# Altium PCB Circuit.PcbDoc
Units mil, origin at the board's own origin, x right, y up, seen from the top; angles counter-clockwise.
Board outline 1600 x 1600 mil, 2 copper layers (Top Layer, Bottom Layer); 11 components, 8 nets, 26 pads, 2 vias.
Unrouted connection lines stored in the file: 1.
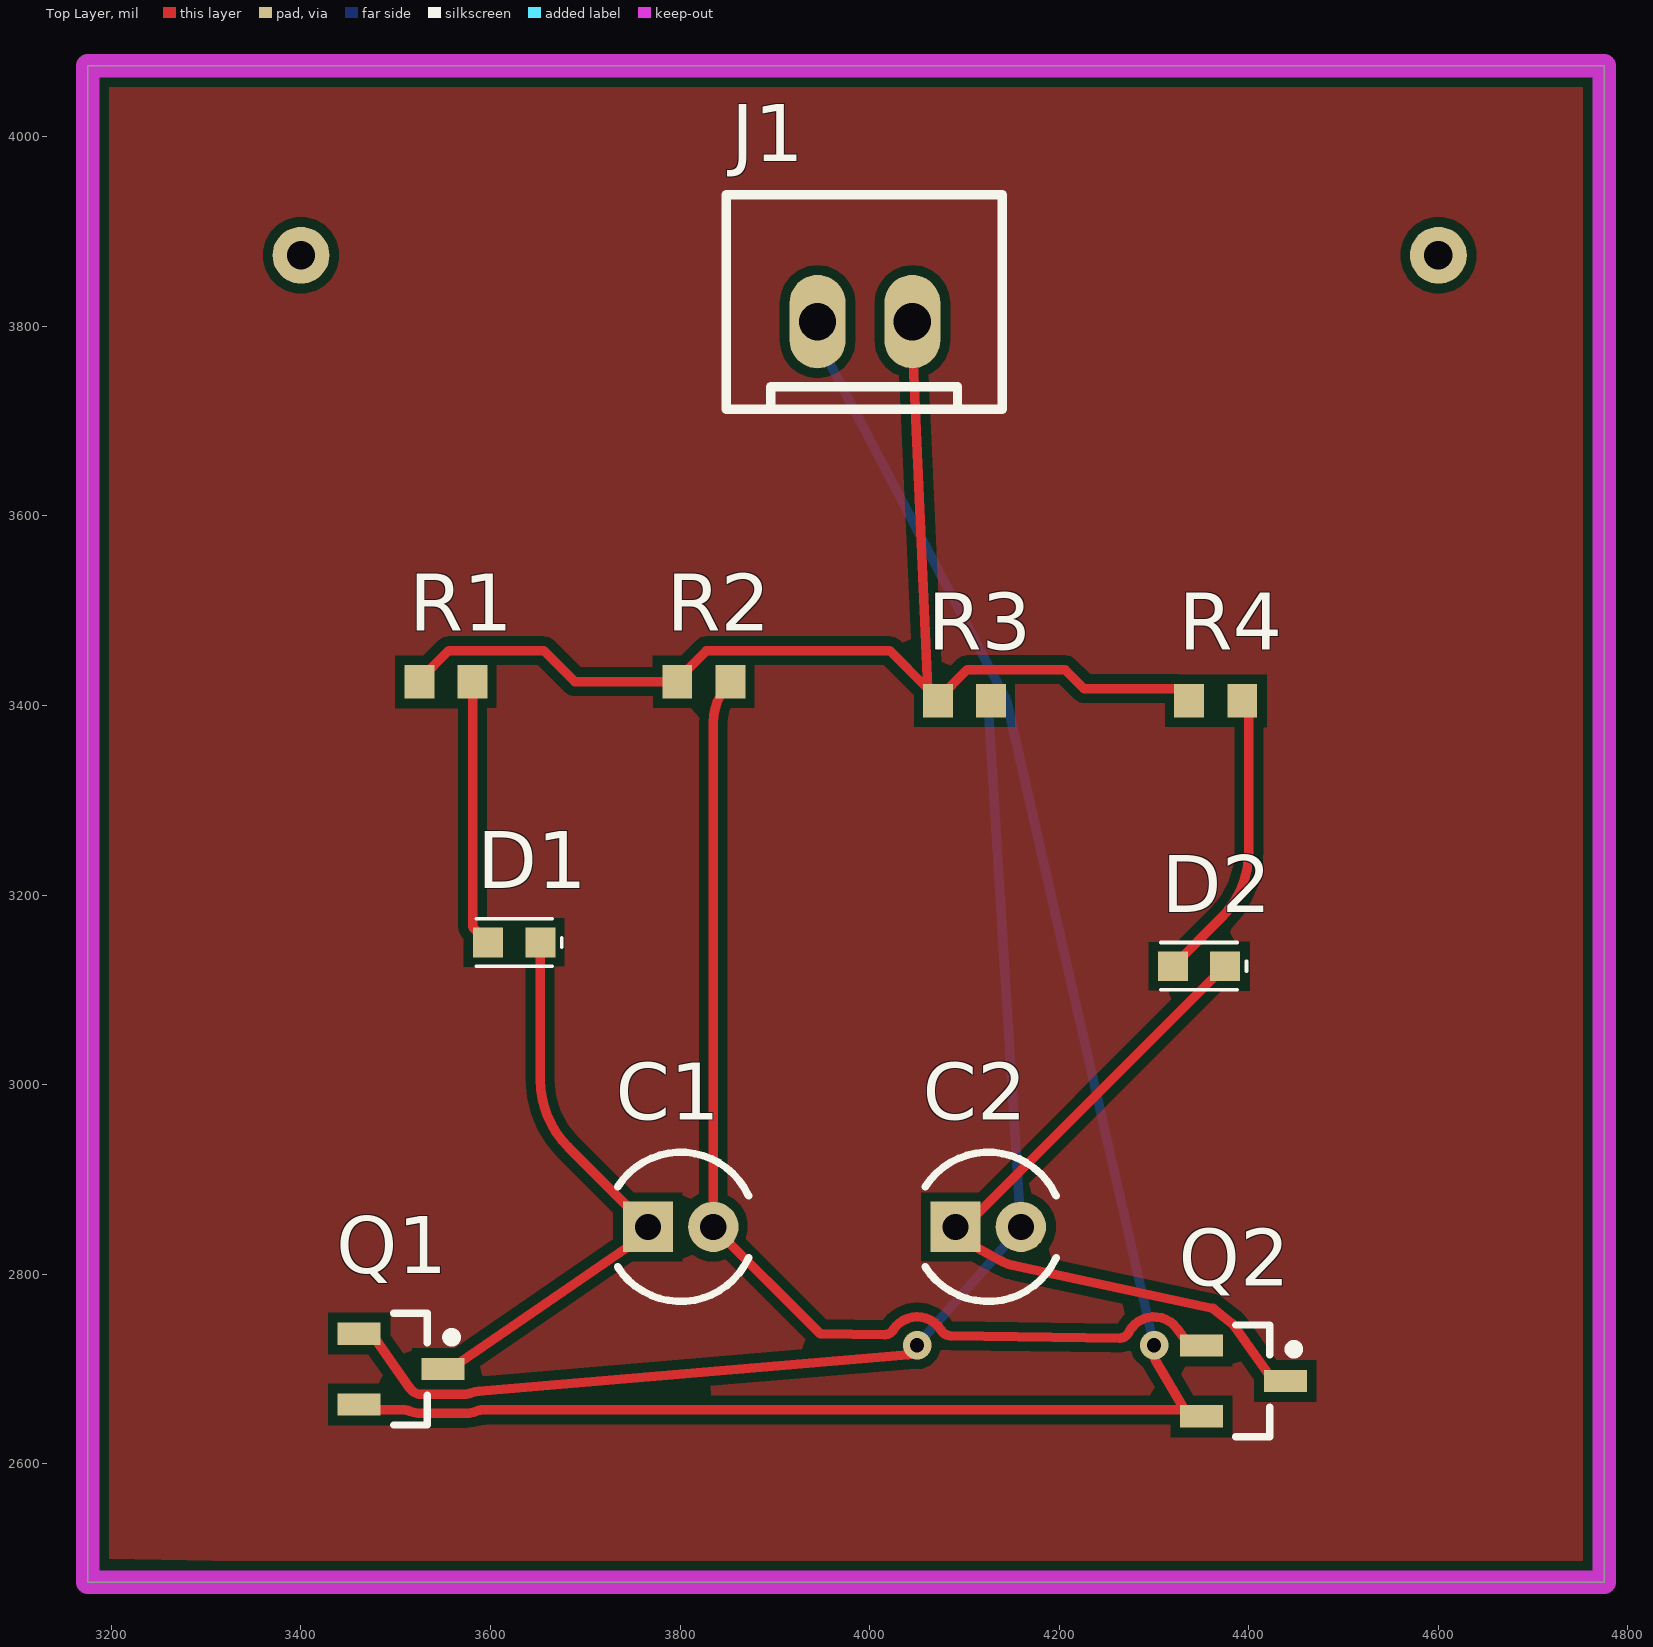
[diagram p0: Top Layer view]
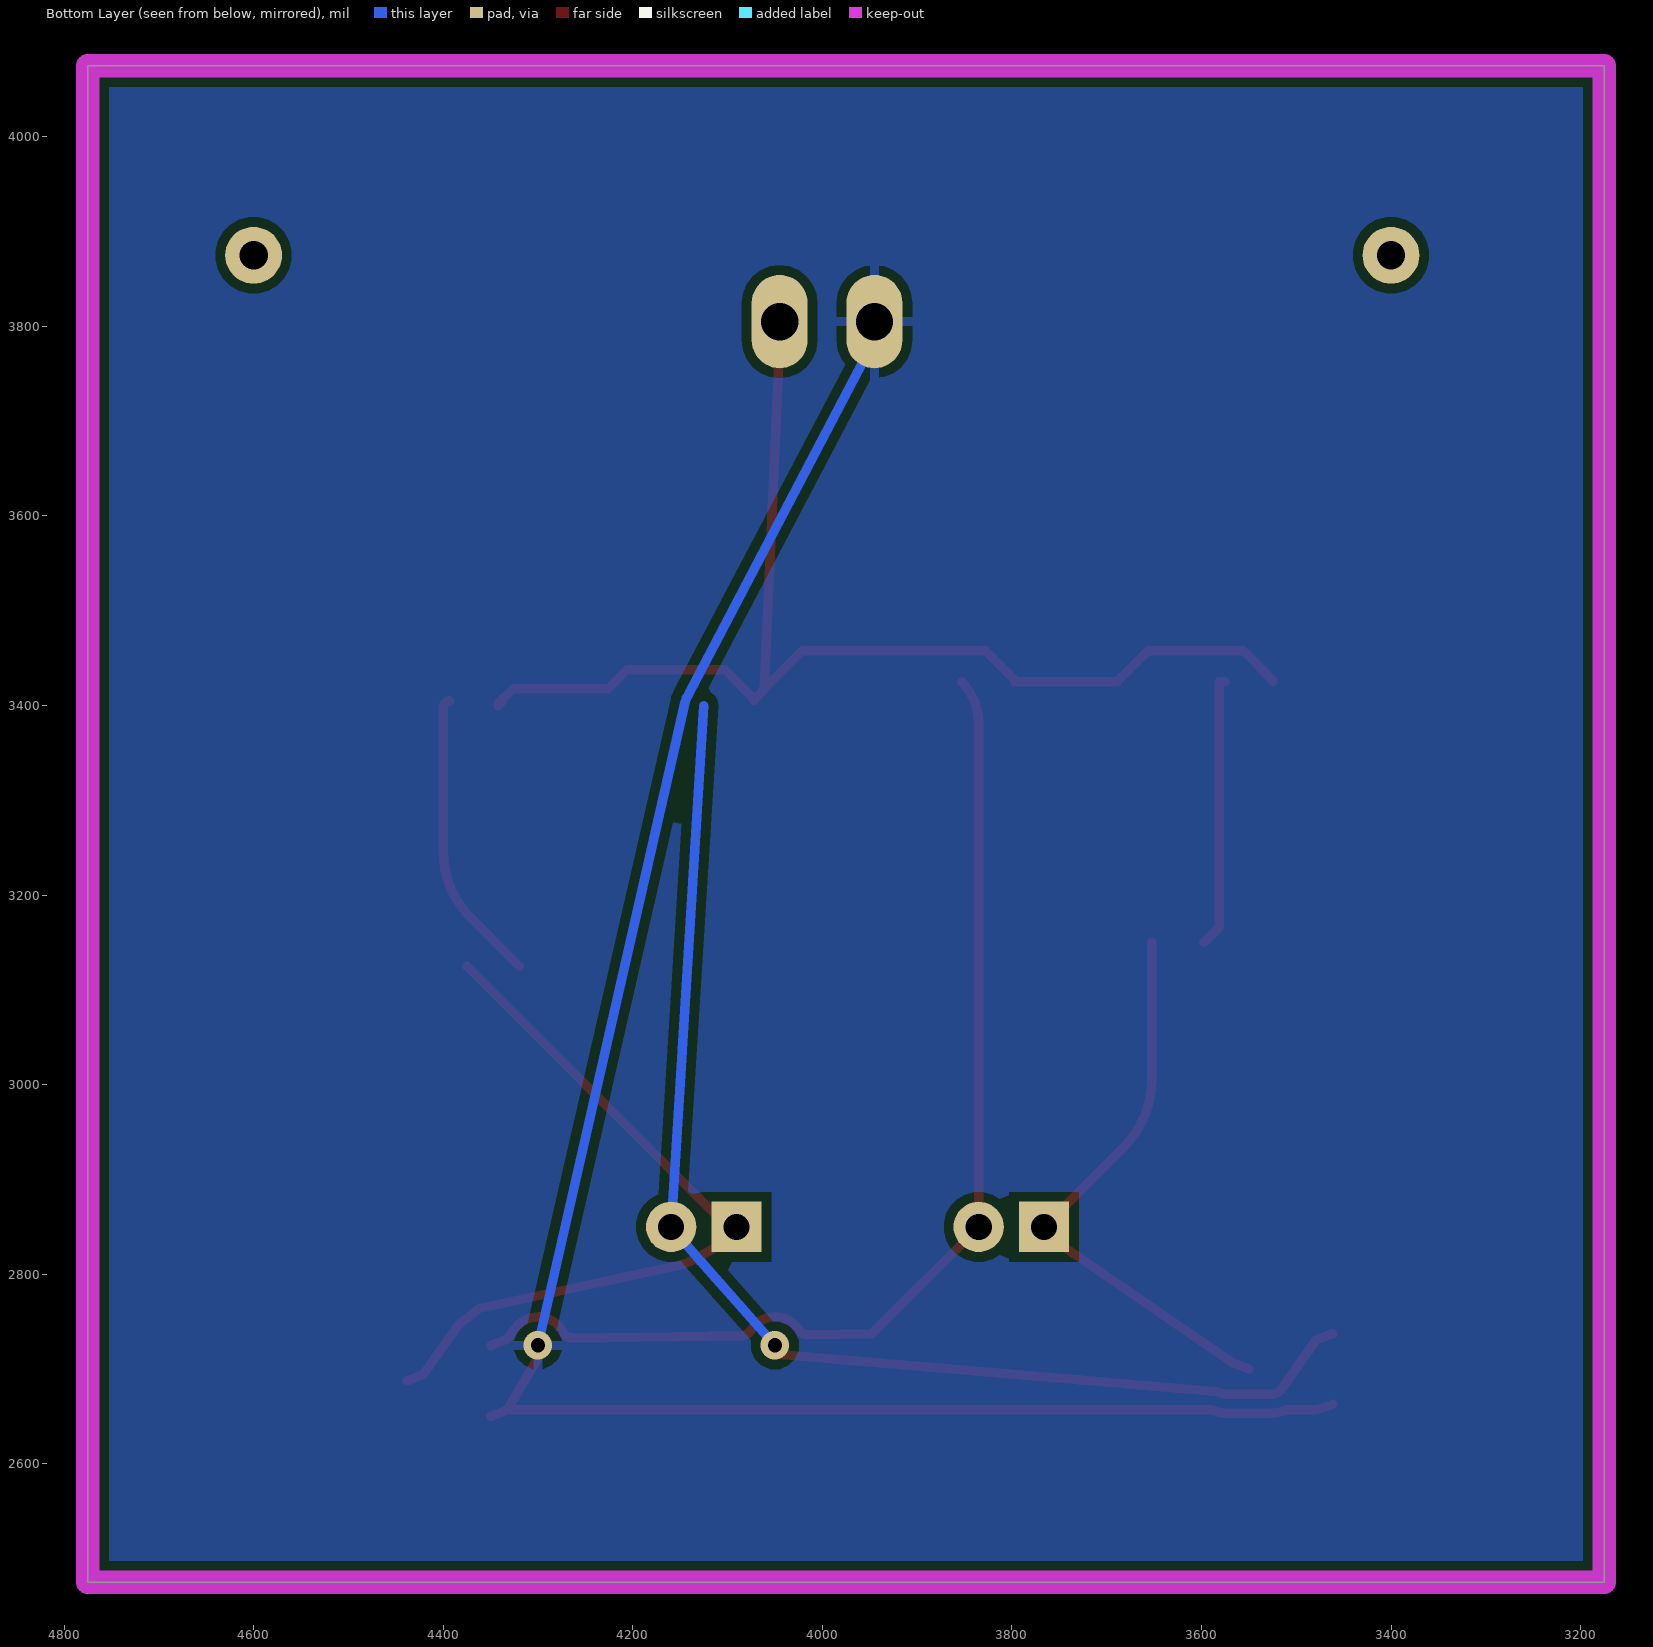
[diagram p1: Bottom Layer view, seen from below]
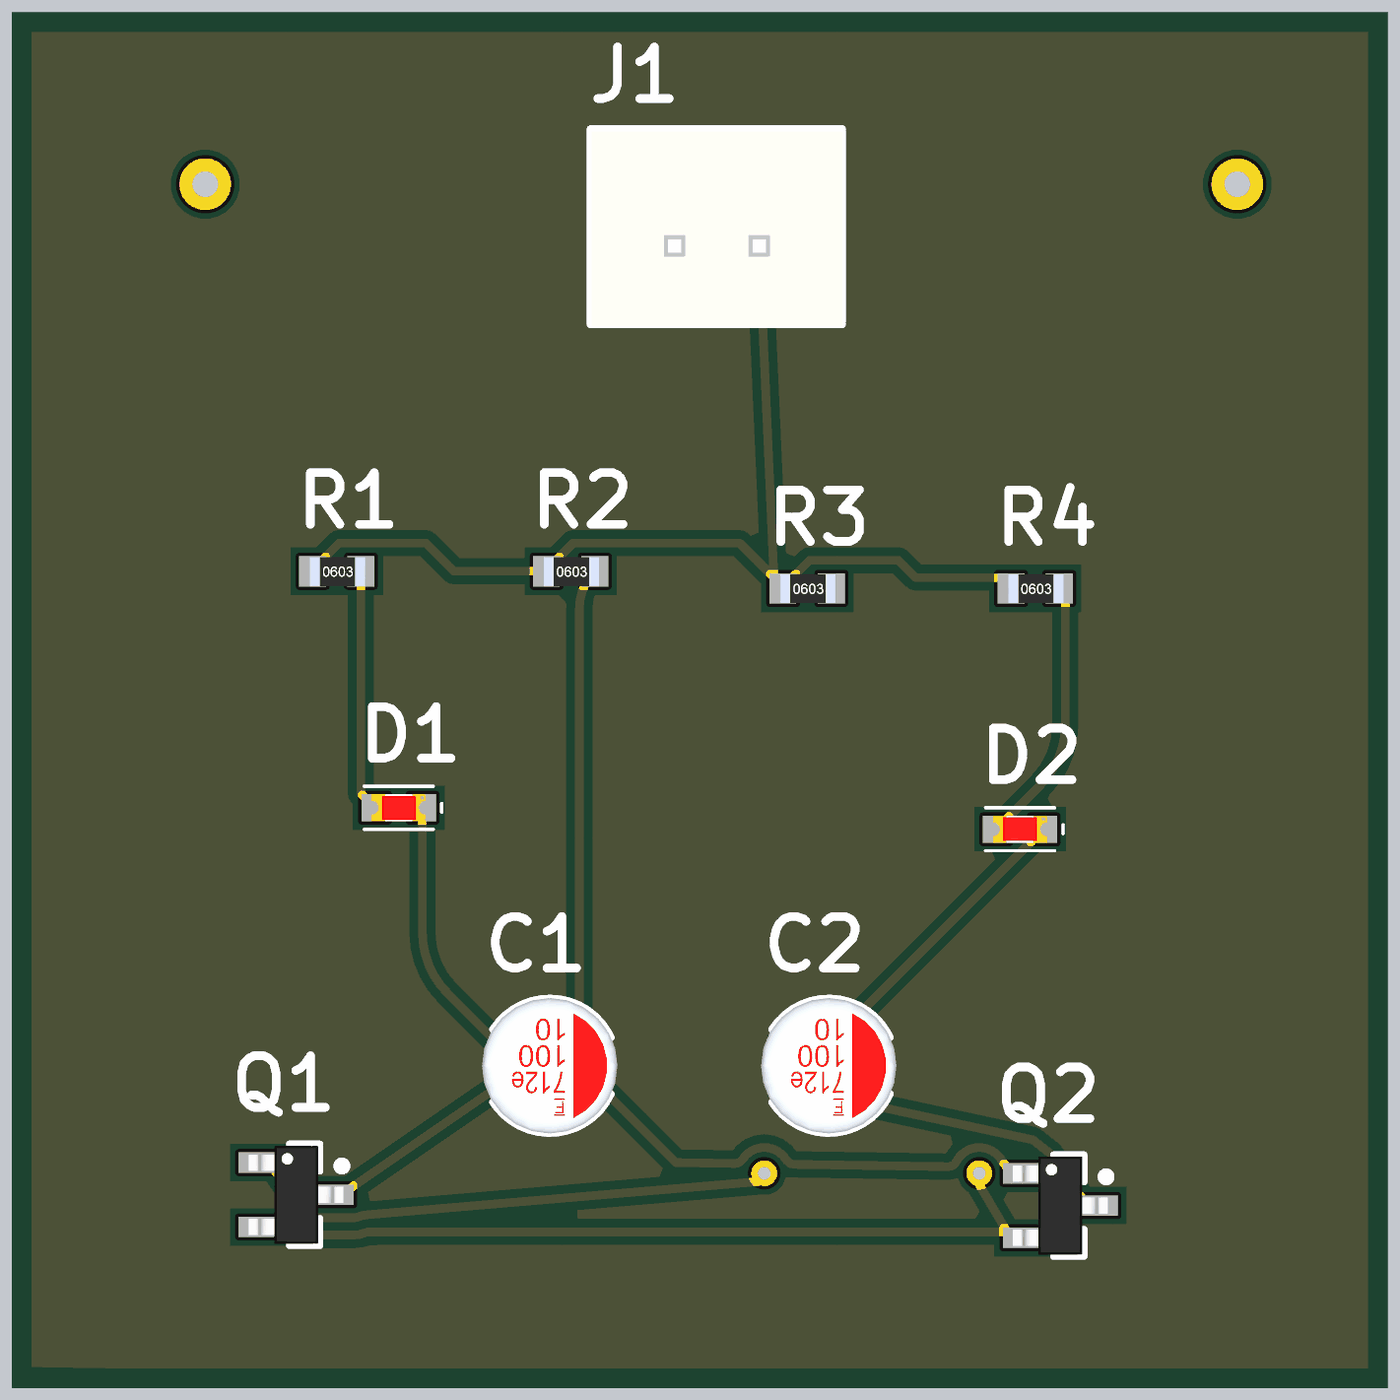
[diagram p2: 3D render of the assembled board from above, using the file's embedded part models]

## Layer stack, top to bottom
Top Solder: solder mask 0.4, Solder Resist, Dk 3.5
Top Layer: signal copper 1.4
Dielectric 1: dielectric 12.6, FR-4, Dk 4.8
Bottom Layer: signal copper 1.4
Bottom Solder: solder mask 0.4, Solder Resist, Dk 3.5

## Board outline
3175,4075 4775,4075 4775,2475 3175,2475

## Design rules (kind name [scope] priority, off if disabled: settings)
Clearance [All] p1: gap=10 ignorepadtopadclearanceinfootprint=FALSE
PolygonConnect [All] p1: connectstyle=Relief reliefconductorwidth=10 reliefentries=4 polygonreliefangle="90 Angle" airgapwidth=10
RoutingVias [All] p1: holewidth=15 width=30 viastyle="Through Hole" minholewidth=15 minwidth=30 maxholewidth=28 maxwidth=50
SolderMaskExpansion [All] p1: expansion=4 istentingtop=FALSE
Width [All] p1: maxlimit=50 minlimit=10 preferedwidth=10
30 further rules are at their usual default settings.

## Components (designator, comment, footprint, x,y, rotation, side; value= is the part's Value field where it differs from the comment)
C1 "Cap2" CAPR5-4X5 3800.55,2850 r0 top value=10uF
C2 "Cap2" CAPR5-4X5 4125,2850 r0 top value=10uF
D1 "LED_SMD" 0603_LED 3625,3150 r0 top value=RED
D2 "LED_SMD" 0603_LED 4347.44,3125 r0 top value=RED
J1 "2 PIN" JST_2_PIN 3945,3805 r0 top
Q1 "MMBT4401" SOT23_N 3505.71,2700 r0 top
Q2 "MMBT4401" SOT23_N 4394.29,2687.4 r0 top
R1 "Res1" R0603 3553,3425 r0 top value=470R
R2 "Res1" R0603 3825,3425 r0 top value=47K
R3 "Res1" R0603 4100,3405 r0 top value=47K
R4 "Res1" R0603 4365,3405 r0 top value=470R

## Footprints (in the part's own frame and the unit in brackets; to place one, negate y for a bottom-side part, rotate by r counter-clockwise, add the part's x,y. Pads: shape width x height; smd on the part's side, far side on the other; paste and mask are expansions set on the pad)
0603_LED [mm] "LED"
  rect 0.8x0.8 smd: 1(-0.7,0) 2(0.7,0)
  silkscreen extent -1.02,-0.64 1.27,0.64, body extent -0.8,-0.4 0.8,0.4, height 0.6
CAPR5-4X5 [mm] "Capacitor; 2 Leads"
  rect 1.35x1.35 hole 0.7: 1(-0.875,0)
  round 1.35 hole 0.7: 2(0.875,0)
  silkscreen extent -1.69,-2 1.82,2, body extent -2,-2 2,2, height 4.71
JST_2_PIN [mm]
  oval 1.5x2.5 hole 1: 1(2.54,0) 2(0,0)
  silkscreen extent -2.45,-2.35 4.95,3.4, body extent -2.43,-2.42 4.97,3.33, height 7
R0603 [mm] "Chip Capacitor, Body 1.6x0.8mm, IPC High Density"
  rect 0.8x0.9 smd: 1(-0.711,0) 2(0.711,0)
  body extent -0.8,-0.43 0.84,0.41, height 0.41
SOT23_N [mm] "SOT23, 3-Leads, Body 2.9x1.3mm, Pitch 0.95mm, Lead Span 2.3mm - Reverse Pinning, IPC Medium Density"
  rect 1.15x0.6 smd: 1(1.125,0) 2(-1.125,-0.95) 3(-1.125,0.95)
  silkscreen extent -0.2,-1.5 1.48,1.5, body extent -1.4,-1.45 1.4,1.45, height 1.3

## Part data
C1 C2: "Capacitor", PackageDescription="Capacitor; 2 Leads", PackageReference=CAPR5-4X5
D1 D2: "LED RED CLEAR 0603 SMD", Digikey Part Number=160-1447-1-ND, Manufacturer Part Number=LTST-C191KRKT, PackageDescription="1.60mm L x 0.80mm W", PackageReference="0603 (1608 Metric)"
J1: library part Connector_2Pin
Q1 Q2: library part NPN, "NPN Bipolar Transistor", Digikey Part Number=MMBT4401LT1GOSCT-ND, Manufacturer="ON Semiconductor", Manufacturer Part Number=MMBT4401LT1G, PackageDescription="SOT-23-3 (TO-236)", PackageReference="SOT-23-3 (TO-236)"
R1 R2 R3 R4: "Resistor", PackageDescription="Axial Device, Thru-Hole; 2 Leads; 0.3 in Pin Spacing", PackageReference=AXIAL-0.3

## Free pads (board coordinates)
  round 60 hole 30: 8(3400,3875) 16(4600,3875)

## Via types
v1: diameter 30, hole 15, Top Layer to Bottom Layer, 2 vias

## Nets (pads, with @x,y where several pads share a name; then routed paths per layer and width w, separated by ;. In a path a pad name is that pad's centre, name@x,y a point inside that pad or via, vN(x,y) a via of type N, cw(c..) or ccw(c..) an arc to the next point about the centre after c; other vN are vias at no path point)
9V: J1.1 R1.1 R2.1 R3.1 R4.1 | length 1306.7
  Top Layer w10: R1.1 3525,3426.97 3555.75,3457.72 3656.29,3457.72 3689,3425 R2.1 3797,3426.97 3827.75,3457.72 4021.25,3457.72 R3.1@4061.25,3417.72 ; J1.1 4045,3785.32 R3.1@4061.25,3417.72 ; R3.1 R3.1@4061.25,3417.72 ; R3.1@4072,3406.97 4102.75,3437.72 4206.15,3437.72 4226.15,3417.72 4326.25,3417.72 4342,3401.97 4342,3400 R4.1
GND: J1.2 Q1.2 Q2.2 | length 2115.4
  Top Layer w10: Q1.2 3479.06,2656.81 3509.67,2656.81 ; 3509.72,2656.81 cw(c3509.63,2646.81) 3513.31,2656.11 3514.48,2655.65 ccw(c3527.36,2688.19) 3527.36,2653.19 3572.64,2653.19 ccw(c3572.64,2688.19) 3585.87,2655.79 ; 3585.88,2655.79 3586.56,2656.07 cw(c3590.34,2646.81) 3590.34,2656.81 Q2.2@4332.36,2656.81 ; v1(4300,2725) 4299.85,2714.86 ccw(c4309.85,2714.76) 4301.21,2709.72 ; 4301.23,2709.68 Q2.2@4332.36,2656.81 ; Q2.2 Q2.2@4332.36,2656.81
  Bottom Layer w10: J1.2 3945,3785.32 4142.7,3409.31 cw(c4125,3400) 4144.5,3404.46 v1(4300,2725)
NetC1_1: C1.1 D1.2 Q1.1 | length 606.8
  Top Layer w10: Q1.1 3567.64,2706.81 3744.53,2828.43 C1.1 3681.85,2934.25 cw(c3752.56,3004.96) 3652.56,3004.96 D1.2
NetC1_2: C1.2 Q2.3 R2.2 | length 1174.5
  Top Layer w10: R2.2 ccw(c3896.46,3381.54) 3835,3381.54 C1.2 3947.6,2737.4 4016.04,2736.37 ; 4016.08,2736.37 ccw(c4016.19,2746.37) 4024.64,2741.02 cw(c4050,2725) 4075.15,2741.35 4076.12,2739.86 ccw(c4084.48,2745.34) 4084.29,2735.35 4263.95,2732.64 ccw(c4264.06,2742.64) 4264.06,2732.64 ccw(c4264.06,2742.64) 4272.81,2737.81 4273.69,2739.42 cw(c4300,2725) 4324.18,2742.76 4332.36,2731.61 Q2.3
NetC2_1: C2.1 D2.2 Q2.1 | length 798.2
  Top Layer w10: D2.2 4106.68,2856.68 cw(c4090.55,2872.81) C2.1 4112.13,2828.43 4139.57,2813.48 ccw(c4159.45,2850) 4150.71,2809.35 4362.21,2763.88 4381.9,2748.41 cw(c4372.64,2736.61) 4384.89,2745.27 4420.94,2694.21 Q2.1
NetC2_2: C2.2 Q1.3 R3.2 | length 1343.4
  Top Layer w10: Q1.3 3479.06,2730.59 3515.11,2679.54 ccw(c3527.36,2688.19) 3527.36,2673.19 3572.64,2673.19 ccw(c3572.64,2688.19) 3578.39,2674.34 3578.93,2674.56 cw(c3590.34,2646.81) 3587.81,2676.7 v1@4040.84,2715.1 ; v1@4040.88,2715.1 ccw(c4040,2725.06) 4050,2724.9 v1(4050,2725)
  Bottom Layer w10: v1(4050,2725) 4128.36,2813.48 ccw(c4117.13,2823.43) 4128.55,2813.7 C2.2 4125,3400
NetD1_1: D1.1 R1.2 | length 287.8
  Top Layer w10: R1.2@3575,3425 R1.2 3581,3166.44 D1.1
NetD2_1: D2.1 R4.2 | length 312.7
  Top Layer w10: D2.1 4370.71,3175.83 ccw(c4300,3246.54) 4400,3246.54 4400,3400 4396.41,3403.59 ccw(c4393,3400.17) R4.2

## Polygon pours and split planes (outlines as drawn)
GND on Bottom Layer "GND_L02_P000" (solid, pour order 0): 3175,2475 3175,4075 4775,4075 4775,2475
GND on Top Layer "GND_L01_P003" (solid, pour order 3): 3175,2475 3175,4075 4775,4075 4775,2475
GND on Top Layer "GND_L01_P002" (solid, pour order 2): 3175,2475 3175,4075 4775,4075 4775,2475
no net on Top Layer "NONET_L01_P001" (solid, pour order 1): 3175,2500 3175,4075 4775,4075 4775,2475

## Keep-outs
Keep-Out Layer:
  lines w25: 3175,2475 3175,4075 ; 3175,2475 4775,2475 ; 3175,2475 3175,4075 ; 3175,2475 4775,2475 ; 3175,4075 4775,4075 ; 3175,4075 4775,4075 ; 4775,2475 4775,4075 ; 4775,2475 4775,4075